# Altium PCB 16-channel-EEG-PCB.PcbDoc (part 1 of 3)
Units mm, origin at the board's own origin, x right, y up, seen from the top; angles counter-clockwise.
Board outline 86.9 x 82.1 mm, 4 copper layers (L1 (Signal), L2 (GND), L3 (PWR), L4 (Signal)), stack 1.57 mm thick; 128 components, 125 nets, 524 pads, 134 vias.
Unrouted connection lines stored in the file: 4.
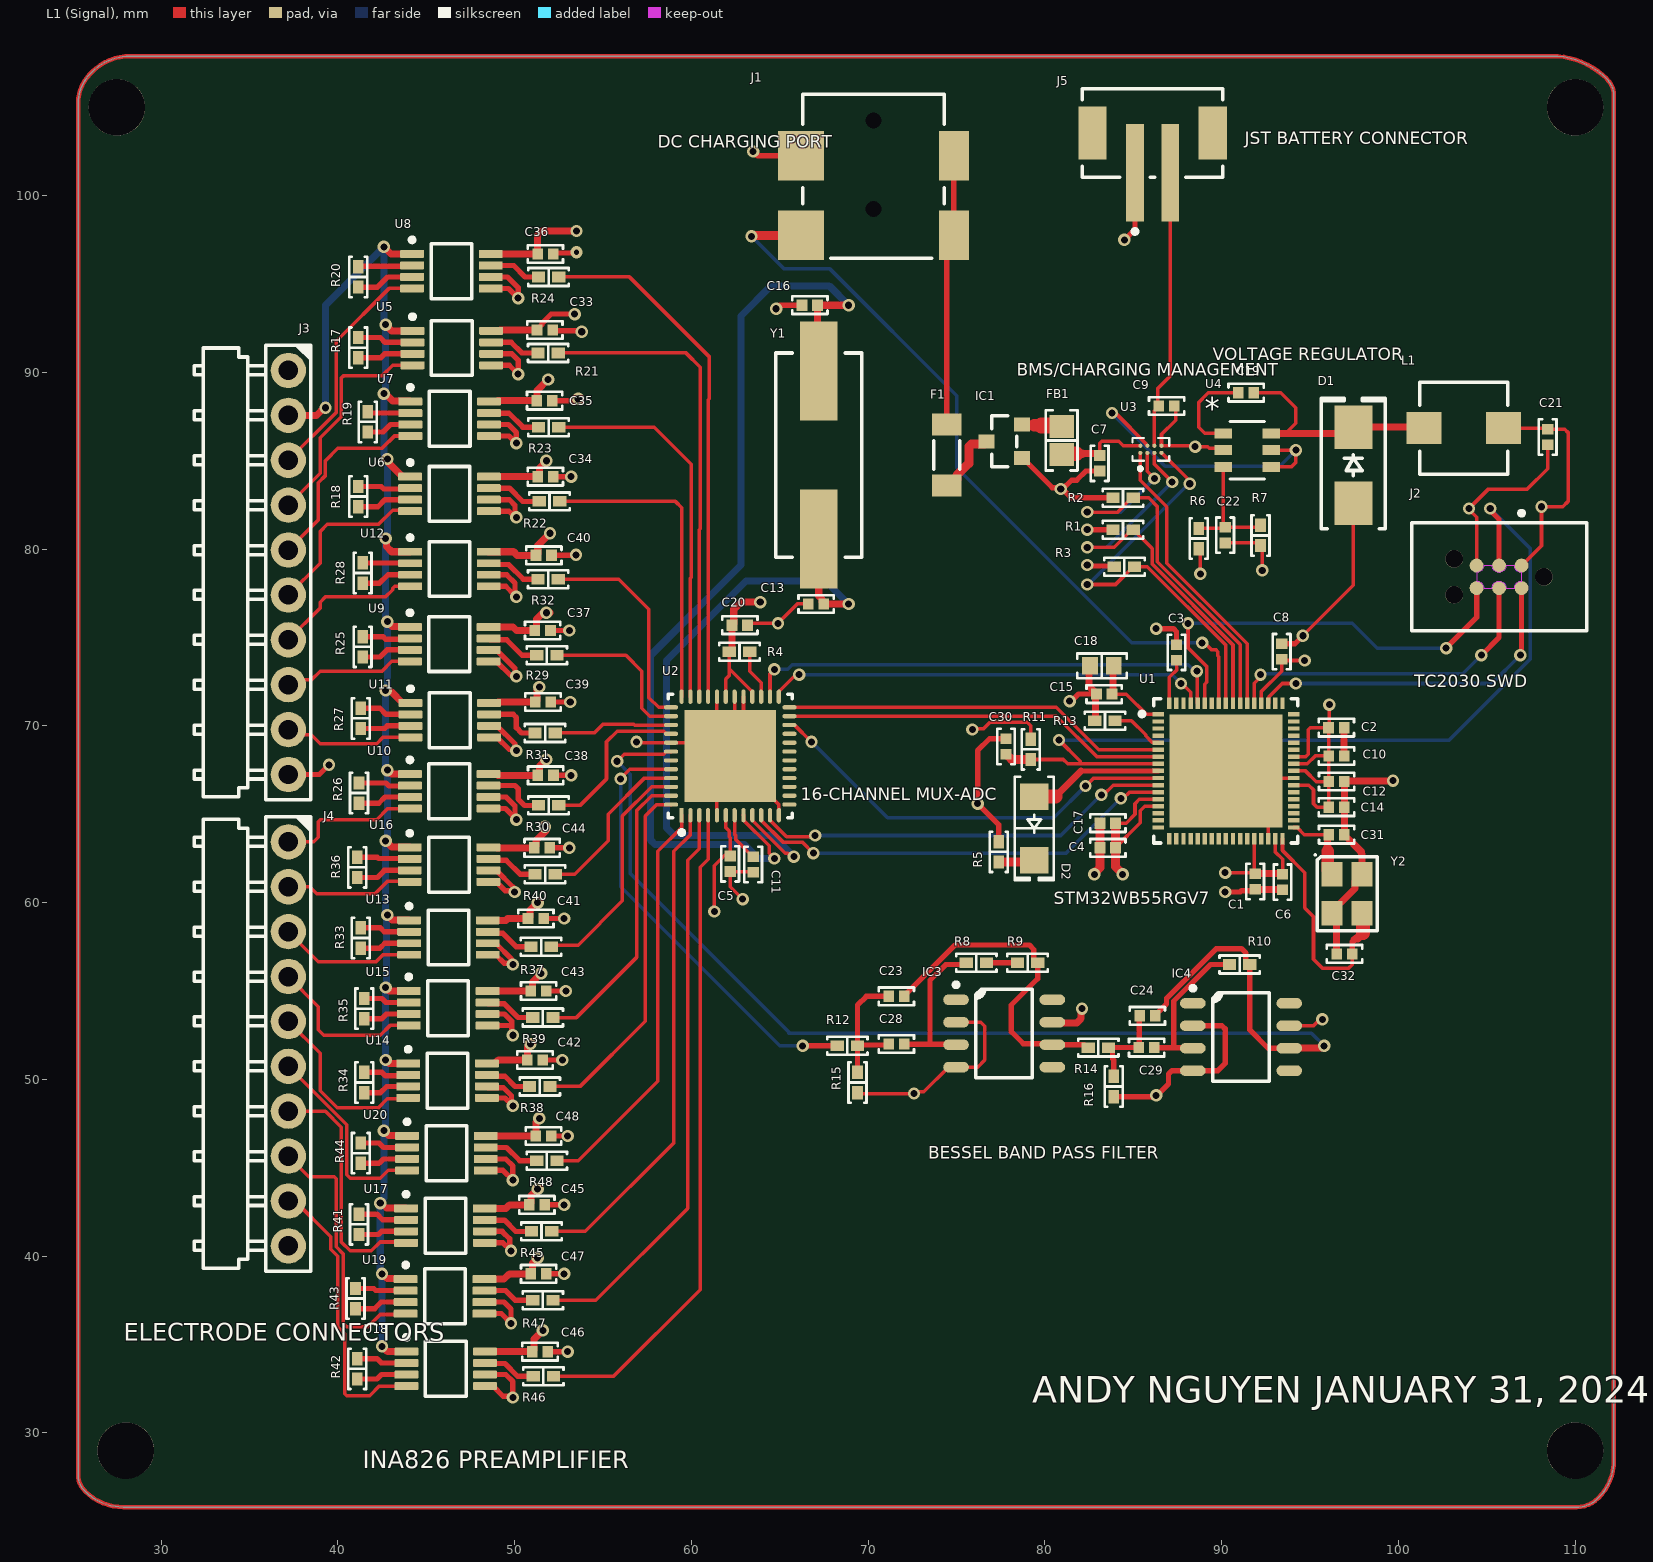
[diagram p0: L1 (Signal) view]
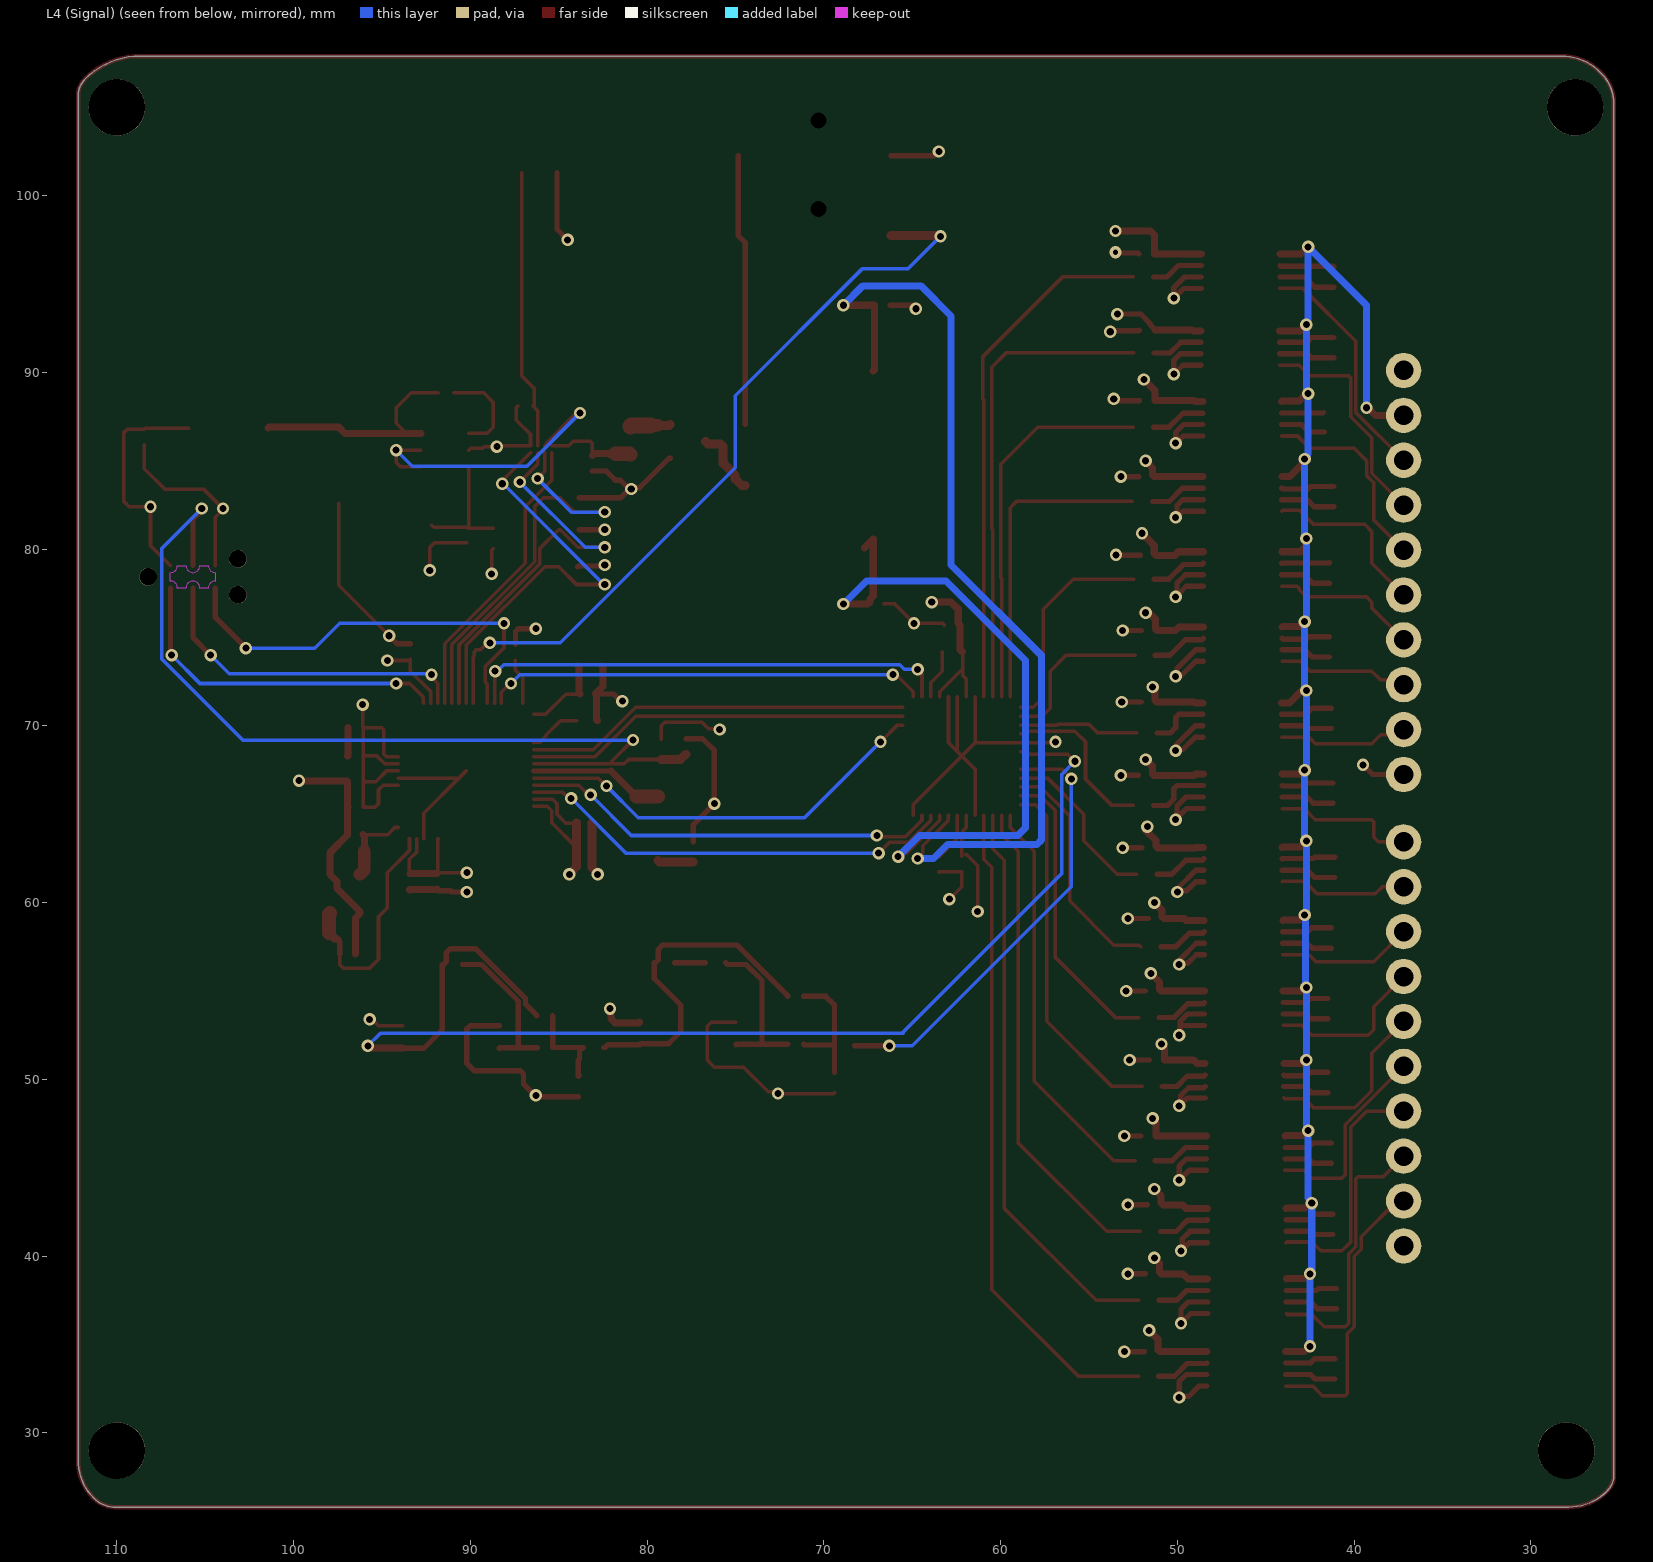
[diagram p1: L4 (Signal) view, seen from below]
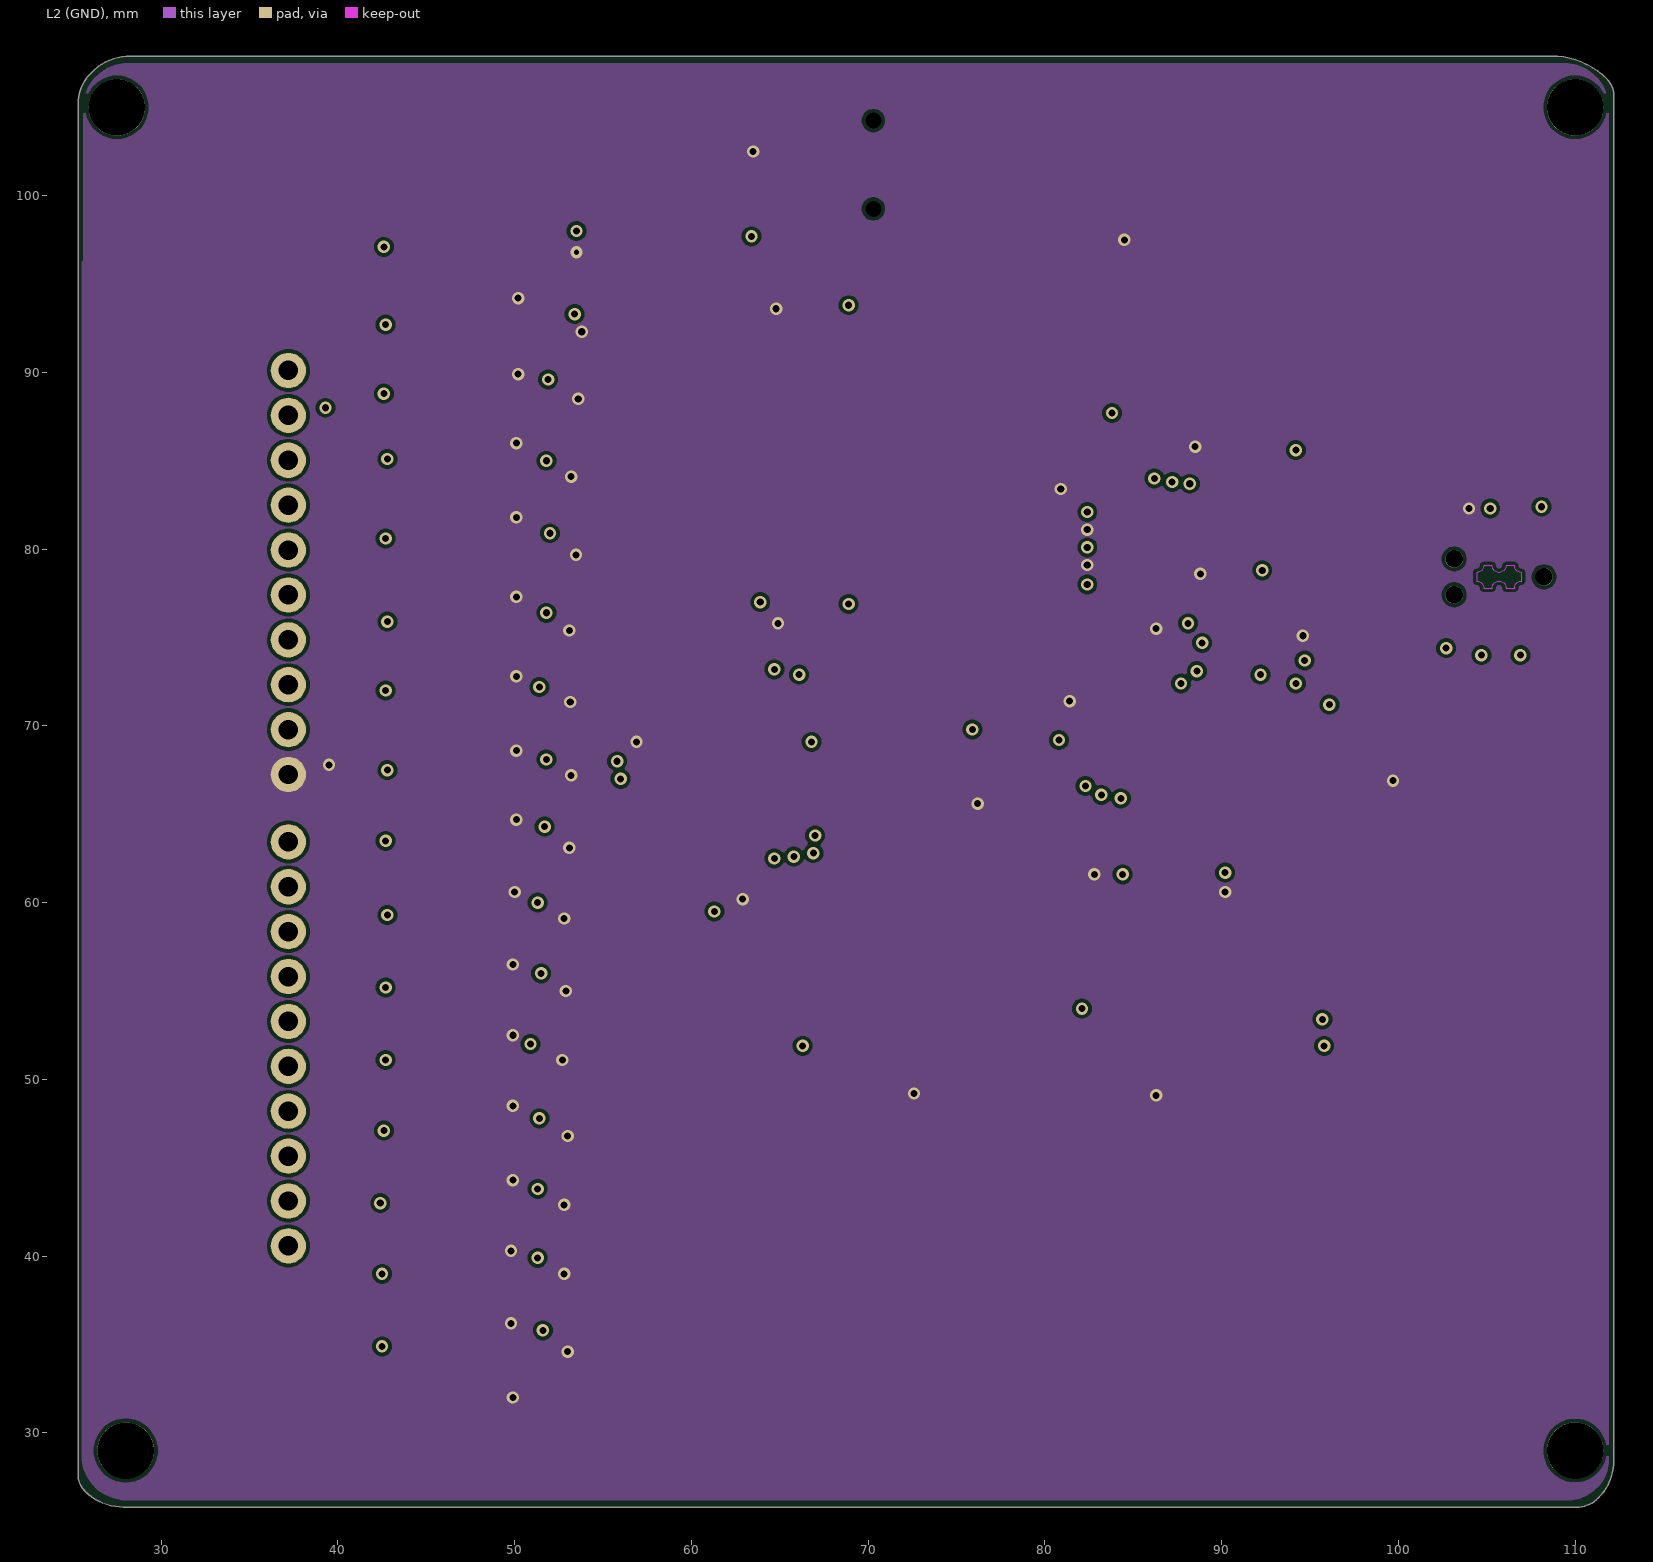
[diagram p2: L2 (GND)]
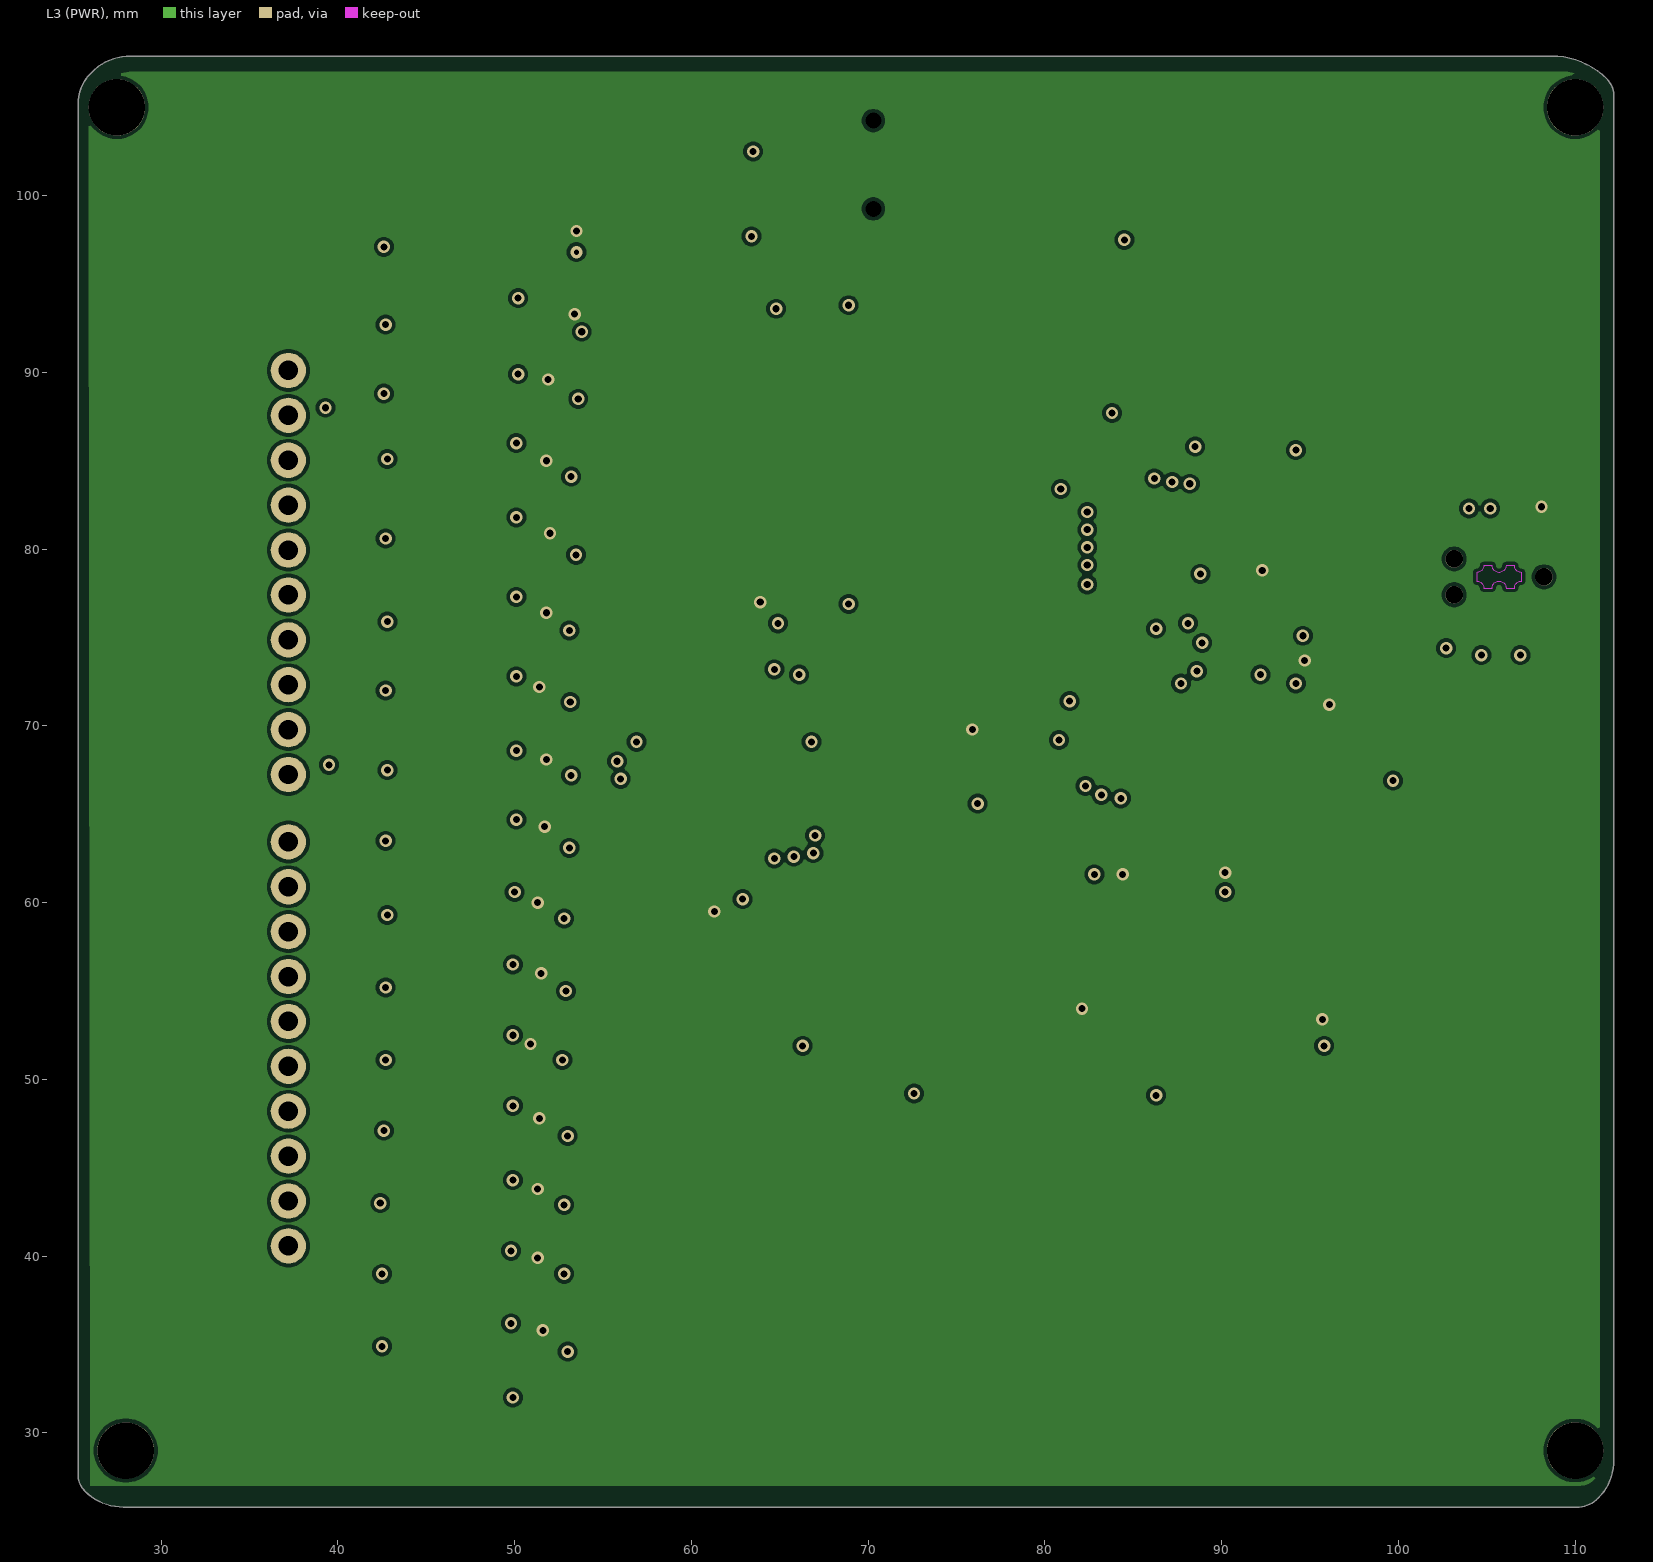
[diagram p3: L3 (PWR)]

## Layer stack, top to bottom
Top Solder: solder mask 0.0254, SM-001, Dk 4
L1 (Signal): signal copper 0.035
Dielectric 1: prepreg 0.2, PP-017, Dk 4.6
L2 (GND): signal copper 0.0175
Dielectric 3: core 1.065, Core-039, Dk 4.6
L3 (PWR): signal copper 0.0175
Dielectric 5: prepreg 0.2, PP-017, Dk 4.6
L4 (Signal): signal copper 0.035
Bottom Solder: solder mask 0.0254, SM-001, Dk 4

## Board outline
25.702,26.698 cw(c26.672,27.668) 25.3,27.668 25.3,105.21 cw(c27.69,105.21) 26,106.9 26.102,107.002 cw(c28.27,104.834) 28.27,107.9 108.664,107.9 cw(c108.664,103.468) 111.798,106.602 cw(c110.828,105.632) 112.2,105.632 112.2,28.47 cw(c109.134,28.47) 111.302,26.302 cw(c110.09,27.514) 110.09,25.8 27.87,25.8 cw(c27.87,28.866)

## Design rules (kind name [scope] priority, off if disabled: settings)
Clearance [All] p1: gap=0.2 ignorepadtopadclearanceinfootprint=TRUE except(0: Arc-Hole Track-Hole SMDPad-Hole THPad-Hole Via-Hole Fill-Hole Poly-Hole Region-Hole Text-Hole; 0.1: Arc-Arc Arc-Track Arc-SMDPad Arc-THPad Arc-Via Arc-Fill Arc-Poly Arc-Region Arc-Text Track-Track Track-SMDPad Track-THPad Track-Via Track-Fill Track-Poly Track-Region Track-Text)
DiffPairsRouting [All] p1: maxlimit=0.254 minlimit=0.203 mostfreqgap=0.254 toplayer_maxgap=0.203 toplayer_prefgap=0.203 toplayer_minwidth=0.26 toplayer_maxwidth=0.26 toplayer_prefwidth=0.26 bottomlayer_maxgap=0.203 bottomlayer_prefgap=0.203 bottomlayer_minwidth=0.26 bottomlayer_maxwidth=0.26 bottomlayer_prefwidth=0.26 impedanceprofiledriven=TRUE impedanceprofileid={877F6D28-D709-45ED-A104-7C5A786EFB2A} impedanceprofilevalue=90.000000 maxuncoupledlength=12.7
PolygonConnect [All] p1: connectstyle=Direct reliefconductorwidth=0.254 reliefentries=4 polygonreliefangle="90 Angle" airgapwidth=0.254
RoutingVias [All] p1: holewidth=0.3 width=0.7 viastyle="Through Hole" minholewidth=0.25 minwidth=0.55 maxholewidth=0.4 maxwidth=0.9
SolderMaskExpansion [All] p1: expansion=0.102 istentingtop=FALSE
UnRoutedNet [All] p1: checkbadconnections=TRUE
Width [All] p1: maxlimit=1 minlimit=0.2 preferedwidth=0.3 minimp=50.000000 maximp=50.000000 favimp=50.000000
28 further rules are at their usual default settings.

## Classes and differential pairs
component class EEG-Electrodes: C33 C34 C35 C36 C37 C38 C39 C40 C41 C42 C43 C44 C45 C46 C47 C48 J3 J4 R17 R18 R19 R20 R21 R22 R23 R24 R25 R26 R27 R28 R29 R30 R31 R32 R33 R34 R35 R36 R37 R38 R39 R40 R41 R42 R43 R44 R45 R46 R47 R48 U5 U6 U7 U8 U9 U10 U11 U12 U13 U14 U15 U16 U17 U18 U19 U20
component class 16-channel-EEG-SCH: C1 C2 C3 C4 C5 C6 C7 C8 C9 C10 C11 C12 C13 C14 C15 C16 C17 C18 C19 C20 C21 C22 C23 C24 C28 C29 C30 C31 C32 D1 D2 F1 FB1 IC1 IC3 IC4 J1 J2 J5 L1 R1 R2 R3 R4 R5 R6 R7 R8 R9 R10 R11 R12 R13 R14 R15 R16 U1 U2 U3 U4 Y1 Y2

## Components (designator, comment, footprint, x,y, rotation, side; value= is the part's Value field where it differs from the comment)
C1 "0.1 µF" "CAP 0402_1005" 91.9,61.2 r270 top
C2 "0.1 µF" "CAP 0402_1005" 96.49,69.9 r0 top
C3 "0.1 µF" "CAP 0402_1005" 87.45,74.16 r90 top
C4 "0.1 µF" "CAP 0402_1005" 83.56,63.1 r180 top
C5 "0.1 µF" "CAP 0402_1005" 62.2,62.2 r90 top
C6 "0.1 µF" "CAP 0402_1005" 93.45,61.16 r270 top
C7 "1 µF" "CAP 0402_1005" 83.1,84.86 r90 top
C8 "0.1 µF" "CAP 0402_1005" 93.4,74.2 r90 top
C9 "1 µF" "CAP 0402_1005" 86.89,88.1 r180 top
C10 "0.1 µF" "CAP 0402_1005" 96.5,68.3 r0 top
C11 "0.022 µF" "CAP 0402_1005" 63.5,62.16 r270 top
C12 "0.1 µF" "CAP 0402_1005" 96.51,66.85 r0 top
C13 "4.7 pF" "CAP 0402_1005" 67.06,76.9 r180 top
C14 "0.1 µF" "CAP 0402_1005" 96.5,65.4 r0 top
C15 "0.1 µF" "CAP 0402_1005" 83.36,71.8 r180 top
C16 "4.7 pF" "CAP 0402_1005" 66.7,93.8 r180 top
C17 "0.1 µF" "CAP 0402_1005" 83.56,64.5 r180 top
C18 "2.2 µF" "CAP 0603_1608" 83.225,73.4 r180 top
C19 "0.1 µF" "CAP 0402_1005" 91.39,88.85 r0 top
C20 "0.1 µF" "CAP 0402_1005" 62.74,75.7 r180 top
C21 "10 µF" "CAP 0402_1005" 108.45,86.35 r90 top
C22 "33 pF" "CAP 0402_1005" 90.2,80.79 r90 top
C23 "10 µF" "CAP 0402_1005" 71.6,54.7 r0 top
C24 "10 µF" "CAP 0402_1005" 85.8,53.6 r0 top
C28 "10 µF" "CAP 0402_1005" 71.6,52 r0 top
C29 "10 µF" "CAP 0402_1005" 85.76,51.8 r0 top
C30 "0.1 µF" "CAP 0402_1005" 77.8,68.84 r270 top
C31 "10 pF" "CAP 0402_1005" 96.51,63.85 r180 top
C32 "10 pF" "CAP 0402_1005" 96.95,57.1 r0 top
C33 "0.1 µF" "CAP 0402_1005" 51.71,92.4 r180 top
C34 "0.1 µF" "CAP 0402_1005" 51.74,84.1 r180 top
C35 "0.1 µF" "CAP 0402_1005" 51.7,88.4 r180 top
C36 "0.1 µF" "CAP 0402_1005" 51.74,96.7 r180 top
C37 "0.1 µF" "CAP 0402_1005" 51.59,75.4 r180 top
C38 "0.1 µF" "CAP 0402_1005" 51.76,67.2 r180 top
C39 "0.1 µF" "CAP 0402_1005" 51.61,71.35 r180 top
C40 "0.1 µF" "CAP 0402_1005" 51.65,79.65 r180 top
C41 "0.1 µF" "CAP 0402_1005" 51.2,59.1 r180 top
C42 "0.1 µF" "CAP 0402_1005" 51.16,51.1 r180 top
C43 "0.1 µF" "CAP 0402_1005" 51.36,55 r180 top
C44 "0.1 µF" "CAP 0402_1005" 51.56,63.1 r180 top
C45 "0.1 µF" "CAP 0402_1005" 51.26,42.9 r180 top
C46 "0.1 µF" "CAP 0402_1005" 51.44,34.6 r180 top
C47 "0.1 µF" "CAP 0402_1005" 51.36,39 r180 top
C48 "0.1 µF" "CAP 0402_1005" 51.64,46.8 r180 top
D1 "SK24-LTP" "DO214AA SMB" 97.45,84.75 r90 top
D2 "Red" "LED 1206_3216 RED" 79.4,64.2 r270 top
F1 "250mAh" "FUSE 1206_3216 0.6MM" 74.45,85.325 r270 top
FB1 "600 Ohms @ 100 MHz" "FER 0805_2012" 80.95,86.15 r270 top
IC1 "ZXMP6A13FTA" "DIODES SOT-23-3" 77.7,86.1 r180 top
IC3 "AD8541ARZ-REEL" "ANALOG DEV SOIC-8 R8" 77.7,52.6 r0 top
IC4 "AD8541ARZ-REEL" "ANALOG DEV SOIC-8 R8" 91.1,52.4 r0 top
J1 "PJ-014DH-SMT-TR" "CUI PJ-014DH-SMT" 70.3,101.1 r90 top
J2 "TC2030-CTX-NL" FP-TC2030-CTX-NL-MFG 105.7,78.435 r180 top
J3 "M20-9961045" "HARWIN M20-9961045" 37.2,78.68 r270 top
J4 "M20-9961045" "HARWIN M20-9961045" 37.2,52.01 r270 top
J5 "B2B-PH-SM4-TBT(LF)(SN)" FP-B2B-PH-SM4-TBT_LF_SN-MFG 86.1,103.55 r0 top
L1 "2.2 µH" "BOURNS SRP5030T" 103.7,86.85 r0 top
R1 "3 Ohms" "RES 0402_1005" 84.425,81.1 r0 top
R2 "3 Ohms" "RES 0402_1005" 84.425,82.9 r0 top
R3 "3 Ohms" "RES 0402_1005" 84.5,79 r0 top
R4 "2.2 kOhms" "RES 0402_1005" 62.725,74.2 r0 top
R5 "1 kOhms" "RES 0402_1005" 77.4,62.875 r270 top
R6 "20 kOhms" "RES 0402_1005" 88.7,80.6 r90 top
R7 "120 kOhms" "RES 0402_1005" 92.2,80.775 r90 top
R8 "35 kOhms" "RES 0402_1005" 76.125,56.6 r0 top
R9 "200 kOhms" "RES 0402_1005" 79.025,56.6 r0 top
R10 "140 Ohms" "RES 0402_1005" 91.025,56.5 r0 top
R11 "10 kOhms" "RES 0402_1005" 79.2,68.675 r90 top
R12 "5 kOhms" "RES 0402_1005" 68.825,51.9 r0 top
R13 "10 kOhms" "RES 0402_1005" 83.4,70.3 r0 top
R14 "3 Ohms" "RES 0402_1005" 83.025,51.8 r0 top
R15 "0 Ohms" "RES 0402_1005" 69.4,49.825 r90 top
R16 "0 Ohms" "RES 0402_1005" 83.9,49.6 r90 top
R17 "10 Ohms" "RES 0402_1005" 41.15,91.4 r90 top
R18 "10 Ohms" "RES 0402_1005" 41.15,82.975 r90 top
R19 "10 Ohms" "RES 0402_1005" 41.7,87.2 r90 top
R20 "10 Ohms" "RES 0402_1005" 41.15,95.4 r90 top
R21 "10 Ohms" "RES 0402_1005" 51.9,91.1 r0 top
R22 "10 Ohms" "RES 0402_1005" 51.975,82.7 r0 top
R23 "10 Ohms" "RES 0402_1005" 51.925,86.9 r0 top
R24 "10 Ohms" "RES 0402_1005" 51.925,95.4 r0 top
R25 "10 Ohms" "RES 0402_1005" 41.4,74.475 r90 top
R26 "10 Ohms" "RES 0402_1005" 41.2,66.2 r90 top
R27 "10 Ohms" "RES 0402_1005" 41.3,70.425 r90 top
R28 "10 Ohms" "RES 0402_1005" 41.4,78.65 r90 top
R29 "10 Ohms" "RES 0402_1005" 51.825,74 r0 top
R30 "10 Ohms" "RES 0402_1005" 51.925,65.5 r0 top
R31 "10 Ohms" "RES 0402_1005" 51.725,69.6 r0 top
R32 "10 Ohms" "RES 0402_1005" 51.9,78.3 r0 top
R33 "10 Ohms" "RES 0402_1005" 41.3,58 r90 top
R34 "10 Ohms" "RES 0402_1005" 41.5,49.825 r90 top
R35 "10 Ohms" "RES 0402_1005" 41.5,54 r90 top
R36 "10 Ohms" "RES 0402_1005" 41.1,62 r90 top
R37 "10 Ohms" "RES 0402_1005" 51.5,57.5 r0 top
R38 "10 Ohms" "RES 0402_1005" 51.425,49.6 r0 top
R39 "10 Ohms" "RES 0402_1005" 51.6,53.5 r0 top
R40 "10 Ohms" "RES 0402_1005" 51.725,61.6 r0 top
R41 "10 Ohms" "RES 0402_1005" 41.2,41.8 r90 top
R42 "10 Ohms" "RES 0402_1005" 41.1,33.625 r90 top
R43 "10 Ohms" "RES 0402_1005" 41,37.6 r90 top
R44 "10 Ohms" "RES 0402_1005" 41.3,45.825 r90 top
R45 "10 Ohms" "RES 0402_1005" 51.525,41.4 r0 top
R46 "10 Ohms" "RES 0402_1005" 51.625,33.2 r0 top
R47 "10 Ohms" "RES 0402_1005" 51.6,37.5 r0 top
R48 "10 Ohms" "RES 0402_1005" 51.825,45.4 r0 top
U1 "STM32WB55RGV6" FP-VFQFPN-68-B029-MFG 90.246,67.451 r0 top
U2 "ADS1258IRTCR" FP-RTC0048A-IPC_C 62.2,68.3 r90 top
U3 "BQ25180YBGR" IC_BQ25180YBGR 86,85.65 r90 top
U4 "MP2451DJ-LF-Z" TSOT23-6_MP2451_MNP 91.45,85.6 r0 top
U5 "INA826AIDGKR" DGK0008A_N 46.447,91.377 r0 top
U6 "INA826AIDGKR" DGK0008A_N 46.317,83.127 r0 top
U7 "INA826AIDGKR" DGK0008A_N 46.327,87.377 r0 top
U8 "INA826AIDGKR" DGK0008A_N 46.425,95.725 r0 top
U9 "INA826AIDGKR" DGK0008A_N 46.304,74.627 r0 top
U10 "INA826AIDGKR" DGK0008A_N 46.3,66.3 r0 top
U11 "INA826AIDGKR" DGK0008A_N 46.334,70.327 r0 top
U12 "INA826AIDGKR" DGK0008A_N 46.314,78.877 r0 top
U13 "INA826AIDGKR" DGK0008A_N 46.259,58.027 r0 top
U14 "INA826AIDGKR" DGK0008A_N 46.206,49.927 r0 top
U15 "INA826AIDGKR" DGK0008A_N 46.239,54.027 r0 top
U16 "INA826AIDGKR" DGK0008A_N 46.292,62.151 r0 top
U17 "INA826AIDGKR" DGK0008A_N 46.083,41.727 r0 top
U18 "INA826AIDGKR" DGK0008A_N 46.103,33.627 r0 top
U19 "INA826AIDGKR" DGK0008A_N 46.063,37.727 r0 top
U20 "INA826AIDGKR" DGK0008A_N 46.143,45.827 r0 top
Y1 "16 MHz" "ABRACON ABLS" 67.207,85.322 r270 top
Y2 "24MHz" "ABRACON ABM8G" 97.1,60.5 r270 top

## Footprints (in the part's own frame and the unit in brackets; to place one, negate y for a bottom-side part, rotate by r counter-clockwise, add the part's x,y. Pads: shape width x height; smd on the part's side, far side on the other; paste and mask are expansions set on the pad)
"ABRACON ABLS" [mm] "Crystal, 2-Leads, Body 4.70x11.40mm, Pitch 8.80mm, IPC Medium Density"
  rect 5.6x2.1 smd: 1(-4.75,0) 2(4.75,0)
  silkscreen extent -5.77,-2.43 5.77,2.43, body extent -6.35,-2.35 6.35,2.35, height 4.2
"ABRACON ABM8G" [mm] "Crystal, 4-Leads, Body 2.50x3.20mm, Pitch 2.20mm, IPC Medium Density"
  rect 1.4x1.2 smd: 1(-1.1,-0.85) 2(1.1,-0.85) 3(1.1,0.85) 4(-1.1,0.85)
  silkscreen extent -2.25,-1.85 2.1,1.7, body extent -1.61,-1.26 1.61,1.26, height 0.6
"ANALOG DEV SOIC-8 R8" [mm] "SOIC, 8-Leads, Body 4.90x3.90mm, Pitch 1.27mm, IPC Medium Density"
  oval 1.45x0.6 smd: 1(-2.725,1.905) 2(-2.725,0.635) 3(-2.725,-0.635) 4(-2.725,-1.905) 5(2.725,-1.905) 6(2.725,-0.635) 7(2.725,0.635) 8(2.725,1.905)
  silkscreen extent -2.85,-2.5 1.6,2.88, body extent -3.01,-2.45 3.01,2.45, height 1.5
"BOURNS SRP5030T" [mm] "Precision Wire Wound Inductor, 2-Leads, Body 5.70x5.20mm, IPC Medium Density"
  rect 2x1.8 smd: 1(-2.25,0) 2(2.25,0)
  silkscreen extent -2.5,-2.6 2.5,2.6, body extent -2.85,-2.6 2.85,2.6, height 3
"CAP 0402_1005" [mm] "Chip Capacitor, 2-Leads, Body 1.02x0.51mm, IPC Medium Density"
  rect 0.6x0.64 smd: 1(-0.44,0) 2(0.44,0)
  silkscreen extent -1,-0.5 1,0.5, body extent -0.5,-0.26 0.5,0.26, height 0.52
"CAP 0603_1608" [mm] "Chip Capacitor, 2-Leads, Body 1.60x0.80mm, IPC Medium Density"
  rect 0.9x1 smd: 1(-0.675,0) 2(0.675,0)
  silkscreen extent -1.4,-0.7 1.4,0.7, body extent -0.8,-0.41 0.8,0.41, height 0.82
"CUI PJ-014DH-SMT" [mm]
  rect 2.8x1.7 smd: 1(-3.35,-4.55) 1(1.15,-4.55)
  rect 2.8x2.6 smd: 2(1.15,4.1) 3(-3.35,4.1)
  round 0 hole 0.9 unplated: M(-1.85,0) M(3.15,0)
  silkscreen extent -4.65,-4 4.65,4, body extent -4.65,-4.8 4.65,4.8, height 5.4
DGK0008A_N [mm] "TSOP, 8-Leads, Body 3.1x3.1mm, Pitch 0.65mm, IPC Medium Density"
  rrect22% 1.35x0.45 smd: 1(-2.225,0.975) 2(-2.225,0.325) 3(-2.225,-0.325) 4(-2.225,-0.975) 5(2.225,-0.975) 6(2.225,-0.325) 7(2.225,0.325) 8(2.225,0.975)
  silkscreen extent -2.35,-1.55 1.15,1.9, body extent -2.45,-1.5 2.45,1.5, height 0.94
"DIODES SOT-23-3" [mm] "SOT23, 3-Leads, Body 2.90x2.40mm, Pitch 0.95mm, IPC Medium Density"
  rect 0.9x0.8 smd: 1(-1,0.95) 2(-1,-0.95) 3(1,0)
  silkscreen extent -0.7,-1.45 0.7,1.45, body extent -1.41,-1.45 1.41,1.45, height 1.5
"DO214AA SMB" [mm] "Molded Diode, 2-Leads, Body 4.31x3.62mm, IPC Medium Density"
  rect 2.45x2.15 smd: 1(-2.15,0) 2(2.15,0)
  silkscreen extent -3.6,-1.8 3.8,1.8, body extent -2.6,-1.8 2.6,1.8, height 2.4
"FER 0805_2012" [mm] "Chip Ferrite, 2-Leads, Body 2.00x1.20mm, IPC Medium Density"
  rect 1.3x1.4 smd: 1(-0.8,0) 2(0.8,0)
  silkscreen extent -1.7,-0.9 1.7,0.9, body extent -1,-0.64 1,0.64, height 1.26
FP-B2B-PH-SM4-TBT_LF_SN-MFG [mm]
  rect 1x5.5 smd paste+0 mask+0: 1(-1,-2.25) 2(1,-2.25)
  rect 1.6x3 smd paste+0 mask+0: 3(-3.4,0) 4(3.4,0)
  silkscreen extent -3.98,-5.7 3.98,2.5, body extent -4.3,-5.1 4.3,2.6, height 0.25
FP-RTC0048A-IPC_C [mm]
  rect 0.81x0.239 smd paste+0 mask+0: 1(-3.351,2.75)
  rrect100% 0.81x0.239 smd paste+0 mask+0: 2(-3.351,2.25) 3(-3.351,1.75) 4(-3.351,1.25) 5(-3.351,0.75) 6(-3.351,0.25) 7(-3.351,-0.25) 8(-3.351,-0.75) 9(-3.351,-1.25) 10(-3.351,-1.75) 11(-3.351,-2.25) 12(-3.351,-2.75) 25(3.351,-2.75) 26(3.351,-2.25) 27(3.351,-1.75) 28(3.351,-1.25) 29(3.351,-0.75) 30(3.351,-0.25) 31(3.351,0.25) 32(3.351,0.75) 33(3.351,1.25) 34(3.351,1.75) 35(3.351,2.25) 36(3.351,2.75)
  rrect100% 0.239x0.81 smd paste+0 mask+0: 13(-2.75,-3.351) 14(-2.25,-3.351) 15(-1.75,-3.351) 16(-1.25,-3.351) 17(-0.75,-3.351) 18(-0.25,-3.351) 19(0.25,-3.351) 20(0.75,-3.351) 21(1.25,-3.351) 22(1.75,-3.351) 23(2.25,-3.351) 24(2.75,-3.351) 37(2.75,3.351) 38(2.25,3.351) 39(1.75,3.351) 40(1.25,3.351) 41(0.75,3.351) 42(0.25,3.351) 43(-0.25,3.351) 44(-0.75,3.351) 45(-1.25,3.351) 46(-1.75,3.351) 47(-2.25,3.351) 48(-2.75,3.351)
  rect 5.2x5.2 smd paste-1000 mask+0: 49(0,0)
  silkscreen extent -4.46,-3.5 3.5,3.5, body extent -3.86,-3.86 3.86,3.86, height 0.25
FP-TC2030-CTX-NL-MFG [mil]
  round 30.98 smd paste-39370.1 mask+0: 1(-50,-25) 2(-50,25) 3(0,-25) 4(0,25) 5(50,-25) 6(50,25)
  round 39.02 hole 39.02 unplated paste-39370.1 mask+0: ""(-100,0) ""(100,-40) ""(100,40)
  Keep-Out Layer region: -34.51,-25 -15.49,-25 -13.96,-18.28 -9.66,-12.89 -3.45,-9.9 3.45,-9.9 9.66,-12.89 13.96,-18.28 15.49,-25 15.49,-25 34.51,-25 35.69,-19.07 39.05,-14.05 44.07,-10.69 50,-9.51 50,-9.51 50,9.51 44.07,10.69 39.05,14.05 35.69,19.07 34.51,25 34.51,25 15.49,25 13.96,18.28 9.66,12.89 3.45,9.9 -3.45,9.9 -9.66,12.89 -13.96,18.28 -15.49,25 -15.49,25 -34.51,25 -35.69,19.07 -39.05,14.05 -44.07,10.69 -50,9.51 -50,9.51 -50,-9.51 -44.07,-10.69 -39.05,-14.05 -35.69,-19.07 -34.51,-25
  silkscreen extent -195,-147 195,120, body extent -199,-124 199,124, height 10
FP-VFQFPN-68-B029-MFG [mm]
  rect 0.65x0.25 smd paste+0 mask+0: 1(-3.825,3.2) 2(-3.825,2.8) 3(-3.825,2.4) 4(-3.825,2) 5(-3.825,1.6) 6(-3.825,1.2) 7(-3.825,0.8) 8(-3.825,0.4) 9(-3.825,0) 10(-3.825,-0.4) 11(-3.825,-0.8) 12(-3.825,-1.2) 13(-3.825,-1.6) 14(-3.825,-2) 15(-3.825,-2.4) 16(-3.825,-2.8) 17(-3.825,-3.2) 35(3.825,-3.2) 36(3.825,-2.8) 37(3.825,-2.4) 38(3.825,-2) 39(3.825,-1.6) 40(3.825,-1.2) 41(3.825,-0.8) 42(3.825,-0.4) 43(3.825,0) 44(3.825,0.4) 45(3.825,0.8) 46(3.825,1.2) 47(3.825,1.6) 48(3.825,2) 49(3.825,2.4) 50(3.825,2.8) 51(3.825,3.2)
  rect 0.25x0.65 smd paste+0 mask+0: 18(-3.2,-3.825) 19(-2.8,-3.825) 20(-2.4,-3.825) 21(-2,-3.825) 22(-1.6,-3.825) 23(-1.2,-3.825) 24(-0.8,-3.825) 25(-0.4,-3.825) 26(0,-3.825) 27(0.4,-3.825) 28(0.8,-3.825) 29(1.2,-3.825) 30(1.6,-3.825) 31(2,-3.825) 32(2.4,-3.825) 33(2.8,-3.825) 34(3.2,-3.825) 52(3.2,3.825) 53(2.8,3.825) 54(2.4,3.825) 55(2,3.825) 56(1.6,3.825) 57(1.2,3.825) 58(0.8,3.825) 59(0.4,3.825) 60(0,3.825) 61(-0.4,3.825) 62(-0.8,3.825) 63(-1.2,3.825) 64(-1.6,3.825) 65(-2,3.825) 66(-2.4,3.825) 67(-2.8,3.825) 68(-3.2,3.825)
  rect 6.4x6.4 smd paste+0 mask+0: 69(0,0)
  silkscreen extent -4.87,-4.08 4.08,4.08, body extent -4.25,-4.25 4.25,4.25, height 0.25
"FUSE 1206_3216 0.6MM" [mm] "Chip Fuse 1.5A AC 63V DC, 2-Leads, Body 3.10x1.55mm, IPC Medium Densitym"
  rect 1.25x1.65 smd: 1(-1.725,0) 2(1.725,0)
  silkscreen extent -0.8,-0.72 0.8,0.72, body extent -1.55,-0.77 1.55,0.78, height 0.76
"HARWIN M20-9961045" [mm] "2.54mm DIL PC TAIL PIN HEADER ASSEMBLY"
  round 2 hole 1.1: 1(-11.43,0) 2(-8.89,0) 3(-6.35,0) 4(-3.81,0) 5(-1.27,0) 6(1.27,0) 7(3.81,0) 8(6.35,0) 9(8.89,0) 10(11.43,0)
  silkscreen extent -12.86,-5.33 12.86,1.3, body extent -12.7,-10.9 12.7,0.32, height 2.54
IC_BQ25180YBGR [mm]
  round 0.23 smd paste-1 mask+0.05: A1(-0.2,0.6) A2(0.2,0.6) B1(-0.2,0.2) B2(0.2,0.2) C1(-0.2,-0.2) C2(0.2,-0.2) D1(-0.2,-0.6) D2(0.2,-0.6)
  silkscreen extent -1.2,-1.04 0.64,1.04
"LED 1206_3216 RED" [mm] "Chip Diode, 2-Leads, Body 3.13x1.55mm, IPC Medium Density"
  rect 1.5x1.6 smd: 1(-1.8,0) 2(1.8,0)
  silkscreen extent -2.92,-1.1 2.92,1.1, body extent -1.6,-0.8 1.6,0.8, height 0.9
"RES 0402_1005" [mm] "Chip Resistor, 2-Leads, Body 1.0x0.5mm, IPC Medium Density"
  rect 0.75x0.6 smd: 1(-0.575,0) 2(0.575,0)
  silkscreen extent -1.14,-0.51 1.14,0.51, body extent -0.5,-0.25 0.5,0.25, height 0.35
TSOT23-6_MP2451_MNP [mil]
  rect 39.5x22 smd paste+0 mask+0: 1(-53.25,37.4) 2(-53.25,0) 3(-53.25,-37.4) 4(53.25,-37.4) 5(53.25,0) 6(53.25,37.4)
  silkscreen extent -38,-64 38,64, body extent -59,-59 59,59, height 39

## Part data
C1 C2 C3 C4 C5 C6 C8 C10 C12 C14 C15 C17 C20 C33 C34 C35 C36 C37 C38 C39 C40 C41 C42 C43 C44 C45 C46 C47 C48: library part C0402C104K4RECAUTO, "CAP CER 0402 0.1UF 16V X7R 10%", Device Package="0402 (1005 Metric)", manufacturer=KEMET, Operating Temperature="-55°C ~ 125°C", Ratings=AEC-Q200, Supplier Part Number 1=399-17167-1-ND, Temperature Coefficient=X7R, Tolerance=±10%, Voltage - Rated=16V, Applications="Automotive, ESD Protection", Capacitance="0.1 µF", componentlink1description=Datasheet, componentlink1url=https://api.kemet.com/component-edge/download/datasheet/C0402C104K4RECAUTO.pdf, componentlink2description="DigiKey Link", componentlink2url=https://www.digikey.com/en/products/detail/kemet/C0402C104K4RECAUTO/8563695, lastupdated="1/28/2024 8:04:20 PM", Lifecycle Status=Active, Minimum Order=1, Mounting Type="Surface Mount, MLCC", Package / Case="0402 (1005 Metric)", packaging=TapeAndReel, Part Number=C0402C104K4RECAUTO, Part Status=Active, partid=1731, price=0.01, series="ESD SMD Auto X7R", Size / Dimension="0.039\" L x 0.020\" W (1.00mm x 0.50mm)", Supplier 1=DigiKey, Thickness (Max)="0.022\" (0.55mm)"
C7 C9: library part GRM155R6YA105KE11D, "CAP CER 1UF 35V X5R 0402", Device Package="0402 (1005 Metric)", manufacturer="Murata Electronics", Operating Temperature="-55°C ~ 85°C", Supplier Part Number 1=490-10019-1-ND, Temperature Coefficient=X5R, Tolerance=±10%, Voltage - Rated=35V, Applications="General Purpose", Capacitance="1 µF", componentlink1description=Datasheet, componentlink1url=https://search.murata.co.jp/Ceramy/image/img/A01X/G101/ENG/GRM155R6YA105KE11-01.pdf, componentlink2description="DigiKey Link", componentlink2url=https://www.digikey.com/en/products/detail/murata-electronics/GRM155R6YA105KE11D/4905162, lastupdated="1/29/2024 8:04:22 PM", Lifecycle Status=Active, Minimum Order=1, Mounting Type="Surface Mount, MLCC", Package / Case="0402 (1005 Metric)", packaging=TapeAndReel, Part Number=GRM155R6YA105KE11D, Part Status=Active, partid=4167, price=0.01, series=GRM, Size / Dimension="0.039\" L x 0.020\" W (1.00mm x 0.50mm)", Supplier 1=DigiKey, Thickness (Max)="0.024\" (0.60mm)"
C11: library part C0402C223K4RECAUTO, "CAP CER 0402 22NF 16V X7R 10%", Device Package="0402 (1005 Metric)", manufacturer=KEMET, Operating Temperature="-55°C ~ 125°C", Ratings=AEC-Q200, Supplier Part Number 1=399-17877-1-ND, Temperature Coefficient=X7R, Tolerance=±10%, Voltage - Rated=16V, Applications="Automotive, ESD Protection", Capacitance="0.022 µF", componentlink1description=Datasheet, componentlink1url=https://api.kemet.com/component-edge/download/datasheet/C0402C223K4RECAUTO.pdf, componentlink2description="DigiKey Link", componentlink2url=https://www.digikey.com/en/products/detail/kemet/C0402C223K4RECAUTO/8640471, lastupdated="1/29/2024 8:04:09 PM", Lifecycle Status=Active, Minimum Order=1, Mounting Type="Surface Mount, MLCC", Package / Case="0402 (1005 Metric)", packaging=TapeAndReel, Part Number=C0402C223K4RECAUTO, Part Status=Active, partid=12106, price=0.01, series="ESD SMD Auto X7R", Size / Dimension="0.039\" L x 0.020\" W (1.00mm x 0.50mm)", Supplier 1=DigiKey, Thickness (Max)="0.022\" (0.55mm)"
C13 C16: library part 885012005023, "CAP CER 4.7PF 16V C0G/NP0 0402", Device Package="0402 (1005 Metric)", manufacturer="Würth Elektronik", Operating Temperature="-55°C ~ 125°C", Supplier Part Number 1=732-7439-1-ND, Temperature Coefficient="C0G, NP0", Tolerance=±0.5pF, Voltage - Rated=16V, Applications="General Purpose", Capacitance="4.7 pF", componentlink1description=Datasheet, componentlink1url=https://katalog.we-online.de/pbs/datasheet/885012005023.pdf, componentlink2description="DigiKey Link", componentlink2url=https://www.digikey.com/en/products/detail/würth-elektronik/885012005023/5453294, lastupdated="1/29/2024 8:04:26 PM", Lifecycle Status=Active, Minimum Order=1, Mounting Type="Surface Mount, MLCC", Package / Case="0402 (1005 Metric)", packaging=TapeAndReel, Part Number=885012005023, Part Status=Active, partid=2042, price=0.01, series=WCAP-CSGP, Size / Dimension="0.039\" L x 0.020\" W (1.00mm x 0.50mm)", Supplier 1=DigiKey, Thickness (Max)="0.022\" (0.55mm)"
C18: library part CC0603ZRY5V7BB225, "CAP CER 2.2UF 16V Y5V 0603", Device Package="0603 (1608 Metric)", manufacturer=Yageo, Operating Temperature="-30°C ~ 85°C", Supplier Part Number 1=311-3416-1-ND, Temperature Coefficient="Y5V (F)", Tolerance="-20%, +80%", Voltage - Rated=16V, Applications="General Purpose", Capacitance="2.2 µF", componentlink1description=Datasheet, componentlink1url=http://www.yageo.com/documents/recent/UPY-GPHC_Y5V_6.3V-to-50V_8.pdf, componentlink2description="DigiKey Link", componentlink2url=https://www.digikey.com/en/products/detail/yageo/CC0603ZRY5V7BB225/5883851, lastupdated="1/28/2024 8:09:58 PM", Lifecycle Status=Active, Minimum Order=1, Mounting Type="Surface Mount, MLCC", Package / Case="0603 (1608 Metric)", packaging=TapeAndReel, Part Number=CC0603ZRY5V7BB225, Part Status=Active, partid=2203, price=0.01, series=CC, Size / Dimension="0.063\" L x 0.031\" W (1.60mm x 0.80mm)", Supplier 1=DigiKey, Thickness (Max)="0.035\" (0.90mm)"
C19: library part GRM155R62A104ME14D, "CAP CER 0.1UF 100V X5R 0402", Device Package="0402 (1005 Metric)", manufacturer="Murata Electronics", Operating Temperature="-55°C ~ 85°C", Supplier Part Number 1=490-10459-1-ND, Temperature Coefficient=X5R, Tolerance=±20%, Voltage - Rated=100V, Applications="General Purpose", Capacitance="0.1 µF", componentlink1description=Datasheet, componentlink1url=https://search.murata.co.jp/Ceramy/image/img/A01X/G101/ENG/GRM155R62A104ME14-01.pdf, componentlink2description="DigiKey Link", componentlink2url=https://www.digikey.com/en/products/detail/murata-electronics/GRM155R62A104ME14D/5027544, lastupdated="1/29/2024 8:04:24 PM", Lifecycle Status=Active, Minimum Order=1, Mounting Type="Surface Mount, MLCC", Package / Case="0402 (1005 Metric)", packaging=CutTape, Part Number=GRM155R62A104ME14D, Part Status=Active, partid=2773, price=0.01, series=GRM, Size / Dimension="0.039\" L x 0.020\" W (1.00mm x 0.50mm)", Supplier 1=DigiKey, Thickness (Max)="0.022\" (0.55mm)"
C21 C23 C24 C28 C29: library part CL05A106MP5NUNC, "CAP CER 10UF 10V X5R 0402", Device Package="0402 (1005 Metric)", manufacturer="Samsung Electro-Mechanics", Operating Temperature="-55°C ~ 85°C", Supplier Part Number 1=1276-1450-1-ND, Temperature Coefficient=X5R, Tolerance=±20%, Voltage - Rated=10V, Applications="General Purpose", Capacitance="10 µF", componentlink1description=Datasheet, componentlink1url=http://www.samsungsem.com/kr/support/product-search/mlcc/CL05A106MP5NUNC.jsp, componentlink2description="DigiKey Link", componentlink2url=https://www.digikey.com/en/products/detail/samsung-electro-mechanics/CL05A106MP5NUNC/3887108, lastupdated="1/29/2024 8:04:27 PM", Lifecycle Status=Active, Minimum Order=1, Mounting Type="Surface Mount, MLCC", Package / Case="0402 (1005 Metric)", packaging=TapeAndReel, Part Number=CL05A106MP5NUNC, Part Status=Active, partid=1762, price=0.02, series=CL, Size / Dimension="0.039\" L x 0.020\" W (1.00mm x 0.50mm)", Supplier 1=DigiKey, Thickness (Max)="0.028\" (0.70mm)"
C22: library part UMK105CH330JVHF, "CAP CER 33PF 50V CH 0402", Device Package="0402 (1005 Metric)", manufacturer="Taiyo Yuden", Ratings=AEC-Q200, Supplier Part Number 1=587-5079-1-ND, Temperature Coefficient=CH, Tolerance=±5%, Voltage - Rated=50V, Applications=Automotive, Capacitance="33 pF", componentlink2description="DigiKey Link", componentlink2url=https://www.digikey.com/en/products/detail/taiyo-yuden/UMK105CH330JVHF/6563672, lastupdated="1/29/2024 8:04:26 PM", Lifecycle Status=Active, Minimum Order=1, Mounting Type="Surface Mount, MLCC", Package / Case="0402 (1005 Metric)", packaging=TapeAndReel, Part Number=UMK105CH330JVHF, Part Status=Active, partid=1883, price=0.01, series=M, Size / Dimension="0.039\" L x 0.020\" W (1.00mm x 0.50mm)", Supplier 1=DigiKey
C30: library part CL05B104KP5VPNC, "CAP CER 100NF 10V X7R 0402", Device Package="0402 (1005 Metric)", manufacturer="Samsung Electro-Mechanics", Operating Temperature="-55°C ~ 125°C", Ratings=AEC-Q200, Supplier Part Number 1=1276-CL05B104KP5VPNCCT-ND, Temperature Coefficient=X7R, Tolerance=±10%, Voltage - Rated=10V, Applications=Automotive, Capacitance="0.1 µF", componentlink1description=Datasheet, componentlink1url=https://mm.digikey.com/Volume0/opasdata/d220001/medias/docus/5458/CL05B104KP5VPNC_Spec.pdf, componentlink2description="DigiKey Link", componentlink2url=https://www.digikey.com/en/products/detail/samsung-electro-mechanics/CL05B104KP5VPNC/20498482, lastupdated="1/25/2024 8:03:07 PM", Lifecycle Status=Active, Minimum Order=1, Mounting Type="Surface Mount, MLCC", Package / Case="0402 (1005 Metric)", packaging=TapeAndReel, Part Number=CL05B104KP5VPNC, partid=56690, price=0.01, series=CL, Size / Dimension="0.039\" L x 0.020\" W (1.00mm x 0.50mm)", Supplier 1=DigiKey, Thickness (Max)="0.022\" (0.55mm)"
C31 C32: library part 885012005025, "CAP CER 10PF 16V C0G/NP0 0402", Device Package="0402 (1005 Metric)", manufacturer="Würth Elektronik", Operating Temperature="-55°C ~ 125°C", Supplier Part Number 1=732-7441-1-ND, Temperature Coefficient="C0G, NP0", Tolerance=±5%, Voltage - Rated=16V, Applications="General Purpose", Capacitance="10 pF", componentlink1description=Datasheet, componentlink1url=https://katalog.we-online.de/pbs/datasheet/885012005025.pdf, componentlink2description="DigiKey Link", componentlink2url=https://www.digikey.com/en/products/detail/würth-elektronik/885012005025/5453296, lastupdated="1/25/2024 8:04:27 PM", Lifecycle Status=Active, Minimum Order=1, Mounting Type="Surface Mount, MLCC", Package / Case="0402 (1005 Metric)", packaging=TapeAndReel, Part Number=885012005025, Part Status=Active, partid=1972, price=0.01, series=WCAP-CSGP, Size / Dimension="0.039\" L x 0.020\" W (1.00mm x 0.50mm)", Supplier 1=DigiKey, Thickness (Max)="0.022\" (0.55mm)"
D1: "DIODE SCHOT 40V 2A DO214AA HSMB", Capacitance @ Vr, F="50pF @ 4V, 1MHz", Current - Average Rectified (Io)=2A, Current - Reverse Leakage @ Vr="2 mA @ 40 V", manufacturer="Micro Commercial Co", Operating Temperature - Junction="-55°C ~ 125°C", Package / Case="DO-214AA, SMB", Supplier Device Package="DO-214AA, HSMB", Supplier Part Number 1=SK24-LTPMSCT-ND, Voltage - DC Reverse (Vr) (Max)="40 V", Voltage - Forward (Vf) (Max) @ If="500 mV @ 2 A", componentlink1description=Datasheet, componentlink1url=https://www.mccsemi.com/pdf/Products/SK22-L~SK220-L(DO-214AA).pdf, componentlink2description="DigiKey Link", componentlink2url=https://www.digikey.com/en/products/detail/micro-commercial-co/SK24-LTP/3774982, Diode Type=Schottky, lastupdated="9/24/2023 8:18:33 PM", Lifecycle Status=Active, Minimum Order=1, Mounting Type="Surface Mount", packaging=TapeAndReel, Part Number=SK24-LTP, Part Status=Active, partid=1499, price=0.04, series=-, Speed="Fast Recovery =< 500ns, > 200mA (Io)", Supplier 1=DigiKey
D2: library part APTR3216SECK/J3-PRV, "LED SMD", Current - Test=20mA, Device Package="1206 (3216 Metric)", Lens Color=Colorless, manufacturer=Kingbright, Millicandela Rating=350mcd, Supplier Device Package=1206, Supplier Part Number 1=754-APTR3216SECK/J3-PRVCT-ND, Voltage - Forward (Vf) (Typ)=2.2V, Color=Red, componentlink1description=Datasheet, componentlink1url=http://www.kingbrightusa.com/images/catalog/SPEC/APTR3216SECK-J3-PRV.pdf, componentlink2description="DigiKey Link", componentlink2url=https://www.digikey.com/en/products/detail/kingbright/APTR3216SECK-J3-PRV/10293085, Configuration=1206, Height (Max)=1.25mm, lastupdated="1/26/2024 9:29:21 PM", Lens Size="1.60mm x 1.40mm", Lens Style="Rectangle with Flat Top", Lens Transparency=Clear, Lifecycle Status=Active, Minimum Order=1, Mounting Type="Surface Mount", Package / Case="1206 (3216 Metric)", packaging=TapeAndReel, Part Number=APTR3216SECK/J3-PRV, Part Status=Active, partid=194, price=0.17, series=Heli-R, Size / Dimension="3.20mm L x 1.60mm W", Supplier 1=DigiKey, Viewing Angle=140°, Wavelength - Dominant=625nm, Wavelength - Peak=640nm
F1: library part SF-1206FP050-2, "FUSE BOARD MNT 500MA 63VDC 1206", Breaking Capacity @ Rated Voltage=50A, Current Rating (Amps)=500mA, Device Package="1206 (3216 Metric)", manufacturer="Bourns Inc.", Operating Temperature="-20°C ~ 105°C", Supplier Part Number 1=SF-1206FP050-2CT-ND, Voltage Rating - DC=63V, Approval Agency=UL, Approvals=UL, componentlink1description=Datasheet, componentlink1url=https://www.bourns.com/docs/product-datasheets/sf-1206fp.pdf, componentlink2description="DigiKey Link", componentlink2url=http://digikey.com/product-detail/en/bourns-inc/SF-1206FP050-2/SF-1206FP050-2CT-ND/7652265, Fuse Type="Board Mount (Cartridge Style Excluded)", lastupdated="9/2/2020 1:30:42 AM", Lifecycle Status=Active, Melting I²t=0.015, Minimum Order=1, Mounting Type="Surface Mount", Package / Case="1206 (3216 Metric)", packaging=TapeAndReel, Part Number=SF-1206FP050-2, Part Status=Active, price=0.34, Response Time="Fast Blow", series="SinglFuse™ SF-1206FP", Size / Dimension="0.122\" L x 0.061\" W x 0.024\" H (3.10mm x 1.55mm x 0.60mm)", Supplier 1=DigiKey
FB1: library part BMB2A0600RS2, "FERRITE BEAD 600 OHM 0805 1LN", Current Rating (Max)=200mA, DC Resistance (DCR) (Max)=500mOhm, Device Package="0805 (2012 Metric)", manufacturer="TE Connectivity Passive Product", Operating Temperature="-55°C ~ 125°C", Supplier Part Number 1=A102078CT-ND, componentlink1description=Datasheet, componentlink1url=https://www.te.com/commerce/DocumentDelivery/DDEController?Action=srchrtrv&DocNm=1773184&DocType=DS&DocLang=English, componentlink2description="DigiKey Link", componentlink2url=https://www.digikey.com/en/products/detail/te-connectivity-passive-product/BMB2A0600RS2/1152529, Height (Max)="0.043\" (1.10mm)", Impedance @ Frequency="600 Ohms @ 100 MHz", lastupdated="9/24/2023 8:16:58 PM", Lifecycle Status=Active, Minimum Order=1, Mounting Type="Surface Mount", Number of Lines=1, Package / Case="0805 (2012 Metric)", packaging=TapeAndReel, Part Number=BMB2A0600RS2, Part Status=Active, partid=1506, price=0.10, series=BMB-R, Size / Dimension="0.079\" L x 0.047\" W (2.00mm x 1.20mm)", Supplier 1=DigiKey
IC1: "MOSFET P-CH 60V 900MA SOT23-3", Current - Continuous Drain (Id) @ 25°C="900mA (Ta)", Drain to Source Voltage (Vdss)="60 V", Drive Voltage (Max Rds On,  Min Rds On)="4.5V, 10V", Input Capacitance (Ciss) (Max) @ Vds="219 pF @ 30 V", manufacturer="Diodes Incorporated", Operating Temperature="-55°C ~ 150°C (TJ)", Package / Case="TO-236-3, SC-59, SOT-23-3", Power Dissipation (Max)="625mW (Ta)", Supplier Device Package=SOT-23-3, Supplier Part Number 1=ZXMP6A13FCT-ND, componentlink1description=Datasheet, componentlink1url=https://www.diodes.com/assets/Datasheets/ZXMP6A13F.pdf, componentlink2description="DigiKey Link", componentlink2url=https://www.digikey.com/en/products/detail/diodes-incorporated/ZXMP6A13FTA/560639, FET Type=P-Channel, Gate Charge (Qg) (Max) @ Vgs="5.9 nC @ 10 V", lastupdated="9/24/2023 8:37:44 PM", Lifecycle Status=Active, Minimum Order=1, Mounting Type="Surface Mount", packaging=TapeAndReel, Part Number=ZXMP6A13FTA, Part Status=Active, price=0.16, Rds On (Max) @ Id, Vgs="400mOhm @ 900mA, 10V", series=-, Supplier 1=DigiKey, Technology="MOSFET (Metal Oxide)", Vgs (Max)=±20V, Vgs(th) (Max) @ Id="3V @ 250µA"
IC3 IC4: "IC OPAMP GP 1 CIRCUIT 8SOIC", Current - Input Bias=4pA, Current - Output / Channel=30mA, Current - Supply=45µA, Device Package="8-SOIC (0.154\", 3.90mm Width)", manufacturer="Analog Devices Inc.", Operating Temperature="-40°C ~ 125°C", Supplier Device Package=8-SOIC, Supplier Part Number 1=AD8541ARZ-REELCT-ND, Voltage - Input Offset=1mV, Voltage - Supply, Single/Dual (±)="2.7V ~ 5.5V", Amplifier Type="General Purpose", componentlink1description=Datasheet, componentlink1url=https://www.analog.com/media/en/technical-documentation/data-sheets/AD8541_8542_8544.pdf, componentlink2description="DigiKey Link", componentlink2url=http://digikey.com/product-detail/en/analog-devices-inc/AD8541ARZ-REEL/AD8541ARZ-REELCT-ND/4907211, Gain Bandwidth Product=1MHz, lastupdated="1/9/2020 12:52:28 AM", Lifecycle Status=Active, Minimum Order=1, Mounting Type="Surface Mount", Number of Circuits=1, Output Type=Rail-to-Rail, Package / Case="8-SOIC (0.154\", 3.90mm Width)", packaging=ReReel, Part Number=AD8541ARZ-REEL, Part Status=Active, partid=10, price=0.00, series=-, Slew Rate=0.92V/µs, Supplier 1=DigiKey
J1: "CONN PWR JACK 1.3X3.4MM SOLDER", Current Rating (Amps)=3.5A, manufacturer="CUI Devices", Material Flammability Rating="UL94 V-0", Supplier Part Number 1=CP-014DHPJTR-ND, Voltage - Rated=24VDC, Actual Diameter="0.051\" (1.30mm ID), 0.154\" (3.90mm OD)", componentlink1description=Datasheet, componentlink1url=https://www.cuidevices.com/product/resource/digikeypdf/pj-014dh-smt-tr.pdf, componentlink2description="DigiKey Link", componentlink2url=//digikey.com/product-detail/en/cui-devices/PJ-014DH-SMT-TR/CP-014DHPJTR-ND/408462, Connector Type=Jack, Features="Board Guide", Gender=Male, Industry Recognized Mating Diameter="1.30mm ID (0.051\"), 3.50mm OD (0.138\")", Internal Switch(s)="Single Switch, Normally Closed", lastupdated="12/16/2019 6:55:19 PM", Lifecycle Status=0, Mating Length/Depth="0.244\" (6.20mm)", Minimum Order=1, Mounting Type="Surface Mount, Right Angle", Number of Positions/Contacts="2 Conductors, 3 Contacts", packaging=TapeAndReel, Part Number=PJ-014DH-SMT-TR, Part Status=Active, price=0.56, series=-, Shielding=Unshielded, Supplier 1=DigiKey, Termination=Solder
J2: library part CMP-205963-000001-1, "6-Pin “No legs” TC2030 Plug-of-Nails™ Cable for use with ARM Cortex processors"
J3 J4: "CONN HEADER R/A 10POS 2.54MM", Current Rating (Amps)="3A per Contact", Insulation Color=Black, manufacturer="Harwin Inc.", Material Flammability Rating="UL94 V-0", Operating Temperature="-40°C ~ 105°C", Supplier Part Number 1=952-2250-ND, componentlink1description=Datasheet, componentlink1url=https://cdn.harwin.com/pdfs/Harwin_PC_Connectors_M20.pdf, componentlink2description="DigiKey Link", componentlink2url=https://www.digikey.com/en/products/detail/harwin-inc/M20-9961045/3728214, Connector Type="Header, Cuttable", Contact Finish - Mating=Gold, Contact Length - Mating="0.240\" (6.10mm)", Contact Length - Post="0.118\" (3.00mm)", Contact Material=Brass, Contact Shape=Square, Contact Type="Male Pin", Fastening Type=Push-Pull, Insulation Height="0.100\" (2.54mm)", Insulation Material="Polyamide (PA6T), Nylon 6T", lastupdated="9/21/2022 7:24:27 PM", Lifecycle Status=Active, Minimum Order=1, Mounting Type="Through Hole, Right Angle", Number of Positions=10, Number of Positions Loaded=All, Number of Rows=1, packaging=Bulk, Part Number=M20-9961045, Part Status=Active, partid=172, Pitch - Mating="0.100\" (2.54mm)", price=0.26, Row Spacing - Mating="-40°C ~ 105°C", series=M20, Shrouding=Unshrouded, Style="Board to Board or Cable", Supplier 1=DigiKey, Termination=Solder
J5: library part CMP-17439-000005-1, "CONN HEADER SMD 2POS 2MM", Current Rating=2A, manufacturer=JST, Package=0, Temperature="-25°C to +85°C", Temperature Range High=+85°C, Temperature Range Low=-25°C, Voltage Rating=100V, Automotive=No, Category=Conn, componentlink2description=Datasheet, componentlink2url=http://www.jst-mfg.com/product/pdf/eng/ePH.pdf, Conn Gender=Male, Conn Orientation=Vertical, Contact Material=Tin,Copper, Device Class L1=Connectors, Device Class L2="Headers and Wire Housings", Device Class L3=unset, Digikey Description="CONN HEADER SMD 2POS 2MM", Height=6.65mm, Lead Free=Yes, Manufacturer Part Number=B2B-PH-SM4-TBT(LF)(SN), Number Of Contacts=2, Number of Rows=1, Octopart=https://octopart.com/b2b-ph-sm4-tbt%28lf%29%28sn%29-jst-7877930, Pitch=2mm, RoHS=TRUE
L1: library part SRP5030T-2R2M, "FIXED IND 2.2UH 5.5A 35 MOHM SMD", Current - Saturation=9A, Current Rating (Amps)="5.5 A", DC Resistance (DCR)="35mOhm Max", Device Package=Nonstandard, Inductance Frequency - Test="100 kHz", manufacturer="Bourns Inc.", Operating Temperature="-40°C ~ 125°C", Supplier Part Number 1=SRP5030T-2R2MCT-ND, Tolerance=±20%, componentlink1description=Datasheet, componentlink1url=https://www.bourns.com/docs/Product-Datasheets/SRP5030T.pdf, componentlink2description="DigiKey Link", componentlink2url=https://www.digikey.com/en/products/detail/bourns-inc/SRP5030T-2R2M/3986082, Height - Seated (Max)="0.118\" (3.00mm)", Inductance="2.2 µH", lastupdated="1/29/2024 9:33:25 PM", Lifecycle Status=Active, Material - Core="Iron Powder", Minimum Order=1, Mounting Type="Surface Mount", Package / Case=Nonstandard, packaging=TapeAndReel, Part Number=SRP5030T-2R2M, Part Status=Active, partid=7, price=0.59, series=SRP5030T, Shielding=Shielded, Size / Dimension="0.224\" L x 0.205\" W (5.70mm x 5.20mm)", Supplier 1=DigiKey, Type="Drum Core, Wirewound"
R1 R2 R3 R14: library part ERJ-2GEJ3R0X, "RES SMD 3 OHM 5% 1/10W 0402", Device Package="0402 (1005 Metric)", manufacturer="Panasonic Electronic Components", Operating Temperature="-55°C ~ 155°C", Power (Watts)="0.1W, 1/10W", Ratings=AEC-Q200, Supplier Device Package=0402, Supplier Part Number 1=P3.0JCT-ND, Temperature Coefficient="-100/ +600ppm/°C", Tolerance=±5%, componentlink1description=Datasheet, componentlink1url=https://b2b-api.panasonic.eu/file_stream/pids/fileversion/1242, componentlink2description="DigiKey Link", componentlink2url=https://www.digikey.com/en/products/detail/panasonic-electronic-components/ERJ-2GEJ3R0X/282081, Composition="Thick Film", Features="Automotive AEC-Q200", Height - Seated (Max)="0.016\" (0.40mm)", lastupdated="1/29/2024 8:27:56 PM", Lifecycle Status=Active, Minimum Order=1, Number of Terminations=2, Package / Case="0402 (1005 Metric)", packaging=CutTape, Part Number=ERJ-2GEJ3R0X, Part Status=Active, partid=3543, price=0.01, Resistance="3 Ohms", series=ERJ-2G, Size / Dimension="0.039\" L x 0.020\" W (1.00mm x 0.50mm)", Supplier 1=DigiKey
R4: library part TNPW04022K20BYEP, "RES 2.2K OHM 0.1% 1/16W 0402", Device Package="0402 (1005 Metric)", manufacturer="Vishay Dale", Operating Temperature="-55°C ~ 155°C", Power (Watts)="0.063W, 1/16W", Ratings=AEC-Q200, Supplier Device Package=0402, Supplier Part Number 1=541-9805-1-ND, Temperature Coefficient=±10ppm/°C, Tolerance=±0.1%, componentlink1description=Datasheet, componentlink1url=http://www.vishay.com/docs/28758/tnpw_e3.pdf, componentlink2description="DigiKey Link", componentlink2url=https://www.digikey.com/en/products/detail/vishay-dale/TNPW04022K20BYEP/8636618, Composition="Thin Film", Features="Anti-Sulfur, Automotive AEC-Q200, Moisture Resistant", Height - Seated (Max)="0.016\" (0.40mm)", lastupdated="1/26/2024 8:27:33 PM", Lifecycle Status=Active, Minimum Order=1, Number of Terminations=2, Package / Case="0402 (1005 Metric)", packaging=TapeAndReel, Part Number=TNPW04022K20BYEP, Part Status=Active, partid=3077, price=0.25, Resistance="2.2 kOhms", series="TNPW e3", Size / Dimension="0.039\" L x 0.020\" W (1.00mm x 0.50mm)", Supplier 1=DigiKey
R5: library part AT0402BRD071KL, "RES SMD 1K OHM 0.1% 1/16W 0402", Device Package="0402 (1005 Metric)", manufacturer=Yageo, Operating Temperature="-55°C ~ 155°C", Power (Watts)="0.063W, 1/16W", Ratings=AEC-Q200, Supplier Device Package=0402, Supplier Part Number 1=YAG2088CT-ND, Temperature Coefficient=±25ppm/°C, Tolerance=±0.1%, componentlink1description=Datasheet, componentlink1url=http://www.yageo.com/documents/recent/PYu-AT_51_RoHS_L_5.pdf, componentlink2description="DigiKey Link", componentlink2url=https://www.digikey.com/en/products/detail/yageo/AT0402BRD071KL/5138607, Composition="Thin Film", Features="Anti-Sulfur, Automotive AEC-Q200, Moisture Resistant", Height - Seated (Max)="0.014\" (0.35mm)", lastupdated="1/25/2024 8:27:25 PM", Lifecycle Status=Active, Minimum Order=1, Number of Terminations=2, Package / Case="0402 (1005 Metric)", packaging=TapeAndReel, Part Number=AT0402BRD071KL, Part Status=Active, partid=2462, price=0.08, Resistance="1 kOhms", series=AT, Size / Dimension="0.039\" L x 0.020\" W (1.00mm x 0.50mm)", Supplier 1=DigiKey
R6: library part CPF0402B20KE, "RES SMD 20K OHM 0.1% 1/16W 0402", Device Package="0402 (1005 Metric)", manufacturer="TE Connectivity Passive Product", Operating Temperature="-55°C ~ 155°C", Power (Watts)="0.063W, 1/16W", Supplier Device Package=0402, Supplier Part Number 1=A119914CT-ND, Temperature Coefficient=±25ppm/°C, Tolerance=±0.1%, componentlink1description=Datasheet, componentlink1url=https://www.te.com/commerce/DocumentDelivery/DDEController?Action=srchrtrv&DocNm=1773200&DocType=DS&DocLang=English, componentlink2description="DigiKey Link", componentlink2url=https://www.digikey.com/en/products/detail/te-connectivity-passive-product/CPF0402B20KE/2381755, Composition="Thin Film", Height - Seated (Max)="0.014\" (0.35mm)", lastupdated="1/29/2024 8:28:00 PM", Lifecycle Status=Active, Minimum Order=1, Number of Terminations=2, Package / Case="0402 (1005 Metric)", packaging=TapeAndReel, Part Number=CPF0402B20KE, Part Status=Active, partid=2476, price=0.10, Resistance="20 kOhms", series="CPF, Neohm", Size / Dimension="0.039\" L x 0.020\" W (1.00mm x 0.50mm)", Supplier 1=DigiKey
R7: library part RC0402FR-07120KL, "RES 120K OHM 1% 1/16W 0402", Device Package="0402 (1005 Metric)", manufacturer=Yageo, Operating Temperature="-55°C ~ 155°C", Power (Watts)="0.063W, 1/16W", Supplier Device Package=0402, Supplier Part Number 1=311-120KLRCT-ND, Temperature Coefficient=±100ppm/°C, Tolerance=±1%, componentlink1description=Datasheet, componentlink1url=https://www.yageo.com/upload/media/product/productsearch/datasheet/rchip/PYu-RC_Group_51_RoHS_L_10.pdf, componentlink2description="DigiKey Link", componentlink2url=https://www.digikey.com/en/products/detail/yageo/RC0402FR-07120KL/726534, Composition="Thick Film", Features="Moisture Resistant", Height - Seated (Max)="0.016\" (0.40mm)", lastupdated="1/29/2024 8:27:59 PM", Lifecycle Status=Active, Minimum Order=1, Number of Terminations=2, Package / Case="0402 (1005 Metric)", packaging=CutTape, Part Number=RC0402FR-07120KL, Part Status=Active, partid=2770, price=0.01, Resistance="120 kOhms", series=RC_L, Size / Dimension="0.039\" L x 0.020\" W (1.00mm x 0.50mm)", Supplier 1=DigiKey
R8: library part RC0402FR-0735KL, "RES 35K OHM 1% 1/16W 0402", Device Package="0402 (1005 Metric)", manufacturer=Yageo, Operating Temperature="-55°C ~ 155°C", Power (Watts)="0.063W, 1/16W", Supplier Device Package=0402, Supplier Part Number 1=13-RC0402FR-0735KLCT-ND, Temperature Coefficient=±100ppm/°C, Tolerance=±1%, componentlink1description=Datasheet, componentlink1url=https://www.yageo.com/upload/media/product/productsearch/datasheet/rchip/PYu-RC_Group_51_RoHS_L_11.pdf, componentlink2description="DigiKey Link", componentlink2url=https://www.digikey.com/en/products/detail/yageo/RC0402FR-0735KL/5917655, Composition="Thick Film", Features="Moisture Resistant", Height - Seated (Max)="0.016\" (0.40mm)", lastupdated="1/29/2024 8:26:21 PM", Lifecycle Status=Active, Minimum Order=1, Number of Terminations=2, Package / Case="0402 (1005 Metric)", packaging=CutTape, Part Number=RC0402FR-0735KL, Part Status=Active, partid=64894, price=0.01, Resistance="35 kOhms", series=RC_L, Size / Dimension="0.039\" L x 0.020\" W (1.00mm x 0.50mm)", Supplier 1=DigiKey
R9: library part RP73PF1E200KBTD, "RES 200K OHM 0.1% 1/10W 0402", Device Package="0402 (1005 Metric)", manufacturer="TE Connectivity Passive Product", Operating Temperature="-55°C ~ 155°C", Power (Watts)="0.1W, 1/10W", Supplier Device Package=0402, Supplier Part Number 1=A127540CT-ND, Temperature Coefficient=±25ppm/°C, Tolerance=±0.1%, componentlink1description=Datasheet, componentlink1url=https://www.te.com/commerce/DocumentDelivery/DDEController?Action=srchrtrv&DocNm=1773272&DocType=DS&DocLang=English, componentlink2description="DigiKey Link", componentlink2url=https://www.digikey.com/en/products/detail/te-connectivity-passive-product/RP73PF1E200KBTD/8261082, Composition="Thin Film", Height - Seated (Max)="0.014\" (0.35mm)", lastupdated="1/29/2024 8:28:00 PM", Lifecycle Status=Active, Minimum Order=1, Number of Terminations=2, Package / Case="0402 (1005 Metric)", packaging=TapeAndReel, Part Number=RP73PF1E200KBTD, Part Status=Active, partid=2427, price=0.08, Resistance="200 kOhms", series="RP73, Holsworthy", Size / Dimension="0.039\" L x 0.020\" W (1.00mm x 0.50mm)", Supplier 1=DigiKey
R10: library part RT0402BRD07140RL, "RES SMD 140 OHM 0.1% 1/16W 0402", Device Package="0402 (1005 Metric)", manufacturer=Yageo, Operating Temperature="-55°C ~ 155°C", Power (Watts)="0.063W, 1/16W", Supplier Device Package=0402, Supplier Part Number 1=YAG1358CT-ND, Temperature Coefficient=±25ppm/°C, Tolerance=±0.1%, componentlink1description=Datasheet, componentlink1url=https://www.yageo.com/upload/media/product/productsearch/datasheet/rchip/PYu-RT_1-to-0.01_RoHS_L_11.pdf, componentlink2description="DigiKey Link", componentlink2url=https://www.digikey.com/en/products/detail/yageo/RT0402BRD07140RL/1069036, Composition="Thin Film", Height - Seated (Max)="0.014\" (0.35mm)", lastupdated="1/29/2024 8:27:55 PM", Lifecycle Status=Active, Minimum Order=1, Number of Terminations=2, Package / Case="0402 (1005 Metric)", packaging=TapeAndReel, Part Number=RT0402BRD07140RL, Part Status=Active, partid=3995, price=0.04, Resistance="140 Ohms", series=RT, Size / Dimension="0.039\" L x 0.020\" W (1.00mm x 0.50mm)", Supplier 1=DigiKey
R11 R13: library part RP73PF1E10KBTD, "RES 10K OHM 0.1% 1/10W 0402", Device Package="0402 (1005 Metric)", manufacturer="TE Connectivity Passive Product", Operating Temperature="-55°C ~ 155°C", Power (Watts)="0.1W, 1/10W", Supplier Device Package=0402, Supplier Part Number 1=A127415CT-ND, Temperature Coefficient=±25ppm/°C, Tolerance=±0.1%, componentlink1description=Datasheet, componentlink1url=https://www.te.com/commerce/DocumentDelivery/DDEController?Action=srchrtrv&DocNm=1773272&DocType=DS&DocLang=English, componentlink2description="DigiKey Link", componentlink2url=https://www.digikey.com/en/products/detail/te-connectivity-passive-product/RP73PF1E10KBTD/8260957, Composition="Thin Film", Height - Seated (Max)="0.014\" (0.35mm)", lastupdated="1/25/2024 8:27:25 PM", Lifecycle Status=Active, Minimum Order=1, Number of Terminations=2, Package / Case="0402 (1005 Metric)", packaging=TapeAndReel, Part Number=RP73PF1E10KBTD, Part Status=Active, partid=2434, price=0.08, Resistance="10 kOhms", series="RP73, Holsworthy", Size / Dimension="0.039\" L x 0.020\" W (1.00mm x 0.50mm)", Supplier 1=DigiKey
R12: library part RC0402FR-075KL, "RES 5K OHM 1% 1/16W 0402", Device Package="0402 (1005 Metric)", manufacturer=Yageo, Operating Temperature="-55°C ~ 155°C", Power (Watts)="0.063W, 1/16W", Supplier Device Package=0402, Supplier Part Number 1=13-RC0402FR-075KLCT-ND, Temperature Coefficient=±100ppm/°C, Tolerance=±1%, componentlink1description=Datasheet, componentlink1url=https://www.yageo.com/upload/media/product/productsearch/datasheet/rchip/PYu-RC_Group_51_RoHS_L_11.pdf, componentlink2description="DigiKey Link", componentlink2url=https://www.digikey.com/en/products/detail/yageo/RC0402FR-075KL/5917711, Composition="Thick Film", Features="Moisture Resistant", Height - Seated (Max)="0.016\" (0.40mm)", lastupdated="1/29/2024 8:26:16 PM", Lifecycle Status=Active, Minimum Order=1, Number of Terminations=2, Package / Case="0402 (1005 Metric)", packaging=CutTape, Part Number=RC0402FR-075KL, Part Status=Active, partid=67880, price=0.01, Resistance="5 kOhms", series=RC_L, Size / Dimension="0.039\" L x 0.020\" W (1.00mm x 0.50mm)", Supplier 1=DigiKey
R15 R16: library part PA0402-R-070RL, "RES 0 OHM JUMPER 1/16W 0402", Device Package="0402 (1005 Metric)", manufacturer=Yageo, Operating Temperature="-55°C ~ 125°C", Power (Watts)="0.1W, 1/10W", Supplier Device Package=0402, Supplier Part Number 1=YAG5756CT-ND, Temperature Coefficient=±150ppm/°C, Tolerance=Jumper, componentlink1description=Datasheet, componentlink1url=http://www.yageo.com/NewPortal/_en/search/productDocs.jsp?YageoPartNumber=PA0402-R-070RL, componentlink2description="DigiKey Link", componentlink2url=https://www.digikey.com/en/products/detail/yageo/PA0402-R-070RL/8255971, Composition="Metal Element", Features="Automotive AEC-Q200, Current Sense", Height - Seated (Max)="0.016\" (0.40mm)", lastupdated="1/29/2024 8:27:06 PM", Lifecycle Status=Active, Minimum Order=1, Number of Terminations=2, Package / Case="0402 (1005 Metric)", packaging=TapeAndReel, Part Number=PA0402-R-070RL, Part Status=Active, partid=15512, price=0.20, Resistance="0 Ohms", series=PA, Size / Dimension="0.039\" L x 0.022\" W (1.00mm x 0.55mm)", Supplier 1=DigiKey